# EAGLE board Funky Kup (EAGLE 9.7.0)

Size 321.62 x 153.28 mm. Coordinates in mm from the lower left corner, seen from the top.
Outline: 0,0 321.62,0 321.62,153.28 0,153.28 0,0
Copper layers (1*16): Top 0.035mm / dielectric 1.5mm / Bottom 0.035mm
Design rules "default": minimum track width 6mil, minimum drill 0.35mm, track to track 6mil, track to pad 6mil, pad to pad 6mil, via to via 6mil, smd to smd 6mil, copper to edge 40mil, drill to drill 6mil, minimum pad ring 10mil, minimum via ring 8mil, stop-mask expansion 4mil, vias tented up to drill 0mil, thermal gap 10mil

## Footprints (pad centres in the part's own frame; a part is rotated, then mirrored left to right if it is on the bottom)
LEDRD254W60D565H860B = drill 0.981 pad 1.581: 1 -1.27,0; 2 1.27,0
LEDRD254W60D565H860B_O = drill 0.981 pad 1.581: 1 -1.27,0; 2 1.27,0
LEDRD254W60D565H860B_Y = drill 0.981 pad 1.581: 1 -1.27,0; 2 1.27,0
LEDRD254W60D565H860B_G = drill 0.981 pad 1.581: 1 -1.27,0; 2 1.27,0
LEDRD254W60D565H860B_B = drill 0.981 pad 1.581: 1 -1.27,0; 2 1.27,0
WS2812-STRIP = drill 1.016 long: 1 -3.81,0; 2 -1.27,0; 3 1.27,0; 4 3.81,0
BATTERY-GENERIC = drill 1.118 pad 3.15 octagon: + 2.54,0; - -2.54,0
RESAD1016W63L850D250B = drill 0.83 pad 1.43: 1 -5.08,0; 2 5.08,0
SEN-13322 = drill 1.016 long: 1 -2.54,0; 2 0,0; 3 2.54,0
ARDUINO-UNO-R3-SHIELD = drill 1.016 pad 1.88: 3.3V 24.13,-2.54; 5V 24.13,0; A0 24.13,12.7; A1 24.13,15.24; A2 24.13,17.78; A3 24.13,20.32; A4 24.13,22.86; A5 24.13,25.4; AREF -24.13,-13.97; D2 -24.13,20.32; D3 -24.13,17.78; D4 -24.13,15.24; D5 -24.13,12.7; D6 -24.13,10.16; D7 -24.13,7.62; D8 -24.13,3.81; D9 -24.13,1.27; D10 -24.13,-1.27; D11 -24.13,-3.81; D12 -24.13,-6.35; D13 -24.13,-8.89; GND@0 24.13,2.54; GND@1 24.13,5.08; GND@2 -24.13,-11.43; IOREF 24.13,-7.62; NC 24.13,-10.16; RES 24.13,-5.08; RX -24.13,25.4; SCL -24.13,-19.05; SDA -24.13,-16.51; TX -24.13,22.86; VIN 24.13,7.62
DIP762W53P254L1969H508Q14B = drill 0.743 pad 1.343: 1 -3.81,7.62; 2 -3.81,5.08; 3 -3.81,2.54; 4 -3.81,0; 5 -3.81,-2.54; 6 -3.81,-5.08; 7 -3.81,-7.62; 8 3.81,-7.62; 9 3.81,-5.08; 10 3.81,-2.54; 11 3.81,0; 12 3.81,2.54; 13 3.81,5.08; 14 3.81,7.62
7SEG-X4-I2C = drill 1.016 long: P$1 -3.81,0; P$2 -1.27,0; P$3 1.27,0; P$4 3.81,0

## Placement (x,y rotation side)
D1  RED  [LEDRD254W60D565H860B]  45.07,136.05 180 top
D2  RED  [LEDRD254W60D565H860B]  284.56,50.57 180 top
D3  ORANGE  [LEDRD254W60D565H860B_O]  289.64,50.57 180 top
D4  YELLOW  [LEDRD254W60D565H860B_Y]  294.72,50.57 180 top
D5  GREEN  [LEDRD254W60D565H860B_G]  299.8,50.57 180 top
D6  BLUE  [LEDRD254W60D565H860B_B]  304.88,50.57 180 top
LED1  WS2812B_STRIP  [WS2812-STRIP]  8.26,40.24 270 top
LED2  WS2812B_STRIP  [WS2812-STRIP]  146.57,48.33 0 top
P1  BATTERYGENERIC  [BATTERY-GENERIC]  224.99,52.58 180 top
R1  3k  [RESAD1016W63L850D250B]  216.56,91.61 0 top
R2  15k  [RESAD1016W63L850D250B]  226.72,91.61 0 top
R3  220  [RESAD1016W63L850D250B]  46.34,130.97 90 top
R4  220  [RESAD1016W63L850D250B]  275.67,60.73 90 top
SEN1  SEN-13322  [SEN-13322]  292.44,7.62 0 top
U1  ARDUINO-UNO-R3-SHIELD  [ARDUINO-UNO-R3-SHIELD]  206.7,123.44 270 top
U2  74HC86_PDIP  [DIP762W53P254L1969H508Q14B]  207.64,122.9 90 top
U3  74HC04_PDIP  [DIP762W53P254L1969H508Q14B]  227.25,122.9 90 top
U4  ARDUINO-UNO-R3-SHIELD  [ARDUINO-UNO-R3-SHIELD]  206.15,123.36 270 top
U5  GREEN  [7SEG-X4-I2C]  180.02,70.41 0 top
U6  ARDUINO-UNO-R3-SHIELD  [ARDUINO-UNO-R3-SHIELD]  55.23,101.76 270 top
U7  ARDUINO-UNO-R3-SHIELD  [ARDUINO-UNO-R3-SHIELD]  287.1,41.68 270 top

## Library data of the parts
D1 D2 = Tinkercad; CATEGORY: Opto-Electronic; SUB-CATEGORY: LED; VALUE: LED_RED
D3 = Tinkercad; CATEGORY: Opto-Electronic; SUB-CATEGORY: LED; VALUE: LED_ORANGE
D4 = Tinkercad; CATEGORY: Opto-Electronic; SUB-CATEGORY: LED; VALUE: LED_YELLOW
D5 = Tinkercad; CATEGORY: Opto-Electronic; SUB-CATEGORY: LED; VALUE: LED_GREEN
D6 = Tinkercad; CATEGORY: Opto-Electronic; SUB-CATEGORY: LED; VALUE: LED_BLUE
LED1 LED2 P1 R1-R4 SEN1 U1-U7 = Tinkercad

## Nets
D1_A: D1.1 R3.2
D2_C: D2.2 D3.2 D4.2 D5.2 D6.2 R4.1
LED1_DOUT: LED1.4 LED2.1
P1+: P1.+ R2.2
P1-: LED1.3 LED2.3 P1.- R1.1 U4.GND@0 U4.GND@1 U4.GND@2 U5.P$2
U4_3.3V: LED1.2 LED2.2 U4.3.3V
U4_5V: U4.5V U5.P$1
U4_A1: R1.2 R2.1 U4.A1
U4_A4: U4.A4 U5.P$3
U4_A5: U4.A5 U5.P$4
U6_D13: R3.1 U6.D13
U6_GND: D1.2 U6.GND@0 U6.GND@1 U6.GND@2
U7_A0: SEN1.1 U7.A0
U7_A1: SEN1.3 U7.A1
U7_D8: D6.1 U7.D8
U7_D9: D5.1 U7.D9
U7_D10: D4.1 U7.D10
U7_D11: D3.1 U7.D11
U7_D12: D2.1 U7.D12
U7_GND: R4.2 SEN1.2 U7.GND@0 U7.GND@1 U7.GND@2

## Tracks (layer width: path | path; a pad name or v marks a point on that pad's centre or on a via)
D1_A  (1 unrouted)
D2_C  (5 unrouted)
LED1_DOUT  (1 unrouted)
P1+  (1 unrouted)
P1-  (7 unrouted)
U4_3.3V  (2 unrouted)
U4_5V  (1 unrouted)
U4_A1  (2 unrouted)
U4_A4  (1 unrouted)
U4_A5  (1 unrouted)
U6_D13  (1 unrouted)
U6_GND  (3 unrouted)
U7_A0  (1 unrouted)
U7_A1  (1 unrouted)
U7_D8  (1 unrouted)
U7_D9  (1 unrouted)
U7_D10  (1 unrouted)
U7_D11  (1 unrouted)
U7_D12  (1 unrouted)
U7_GND  (4 unrouted)